# Altium PCB PCB1.PcbDoc
Units mil, origin at the board's own origin, x right, y up, seen from the top; angles counter-clockwise.
Board outline 3275 x 2910 mil, 2 copper layers (Top Layer, Bottom Layer); 11 components, 12 nets, 70 pads, 0 vias.
Unrouted connection lines stored in the file: 1.
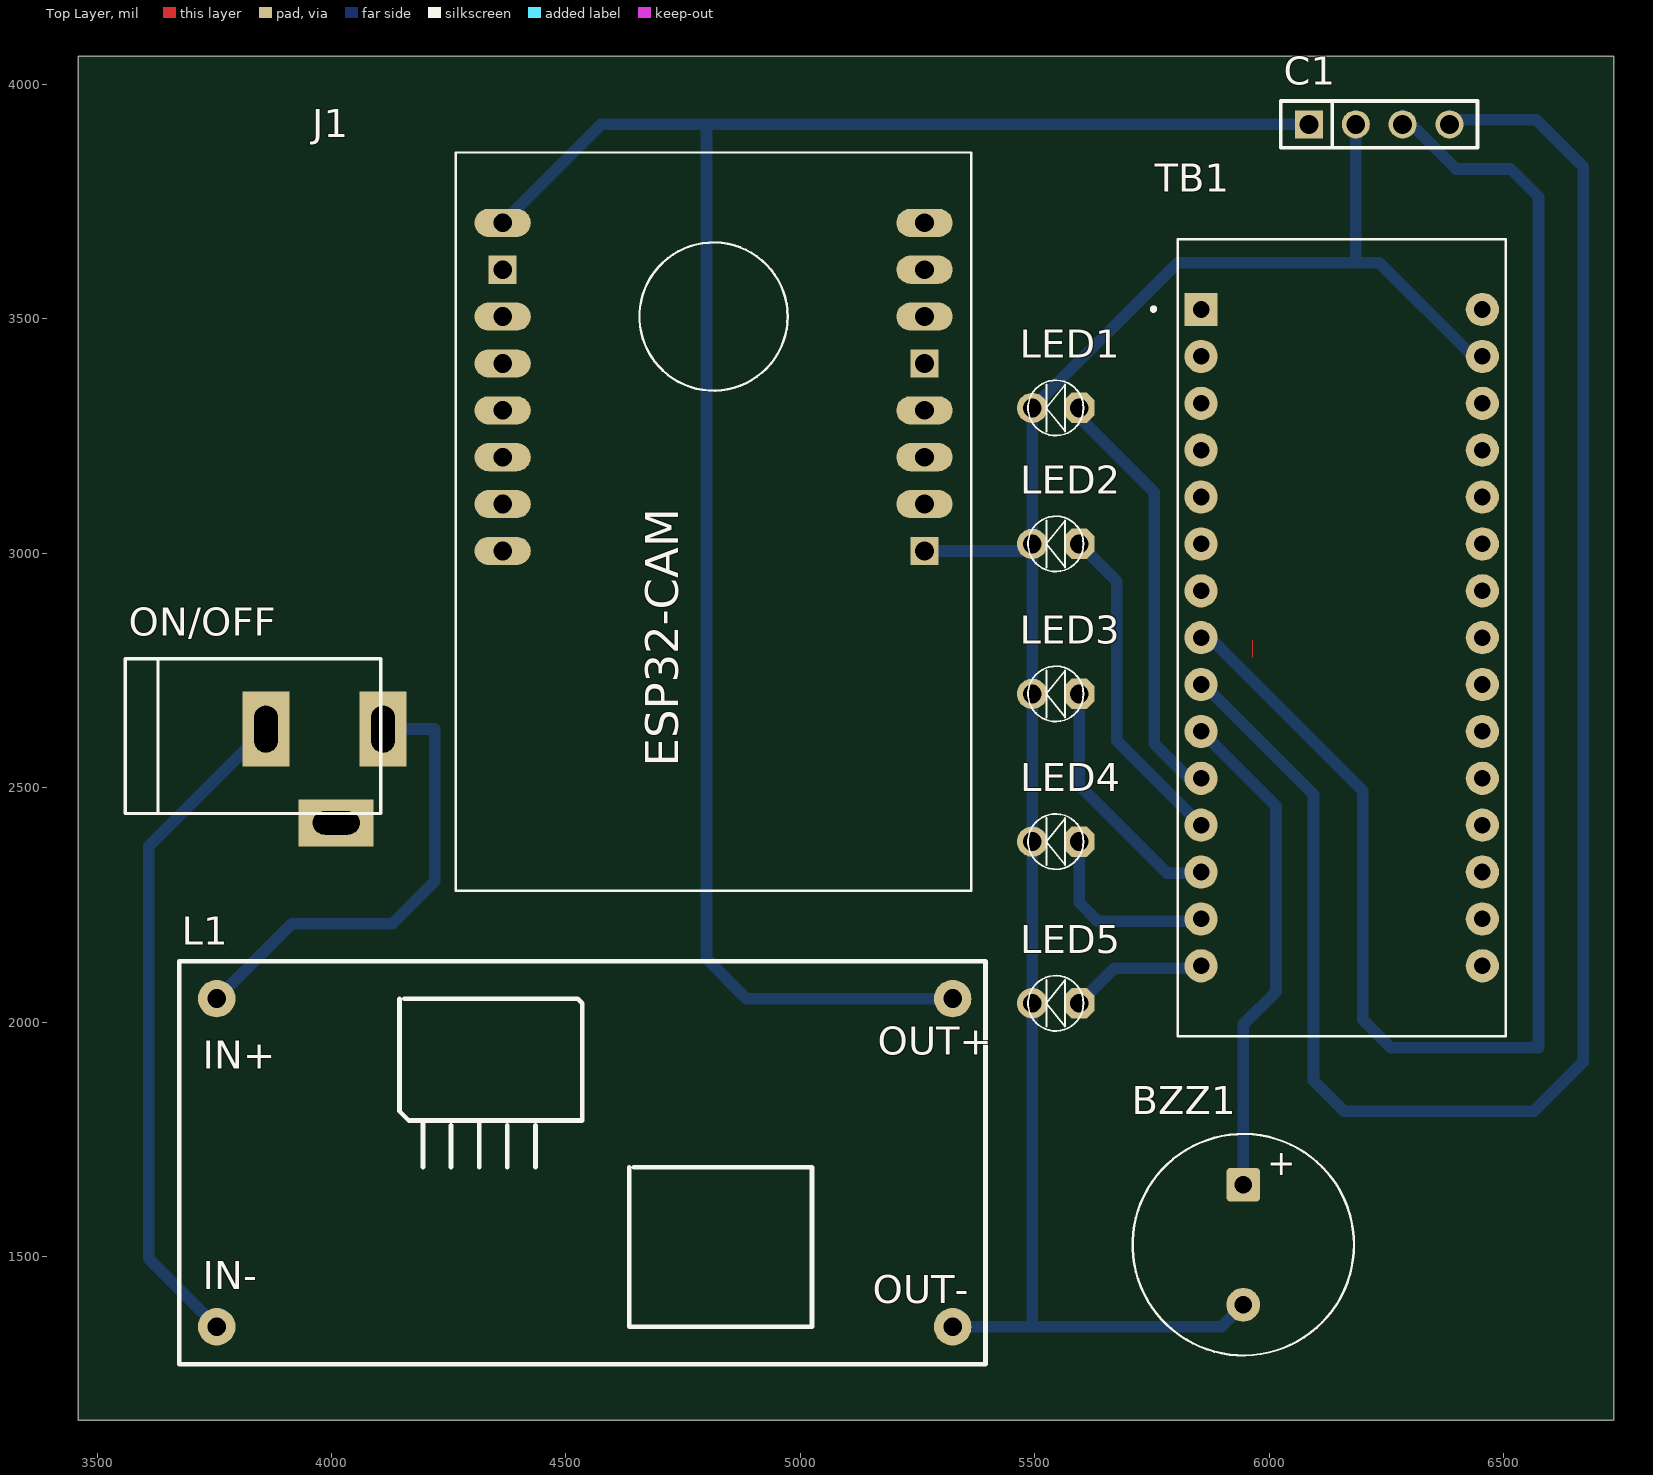
[diagram p0: Top Layer view]
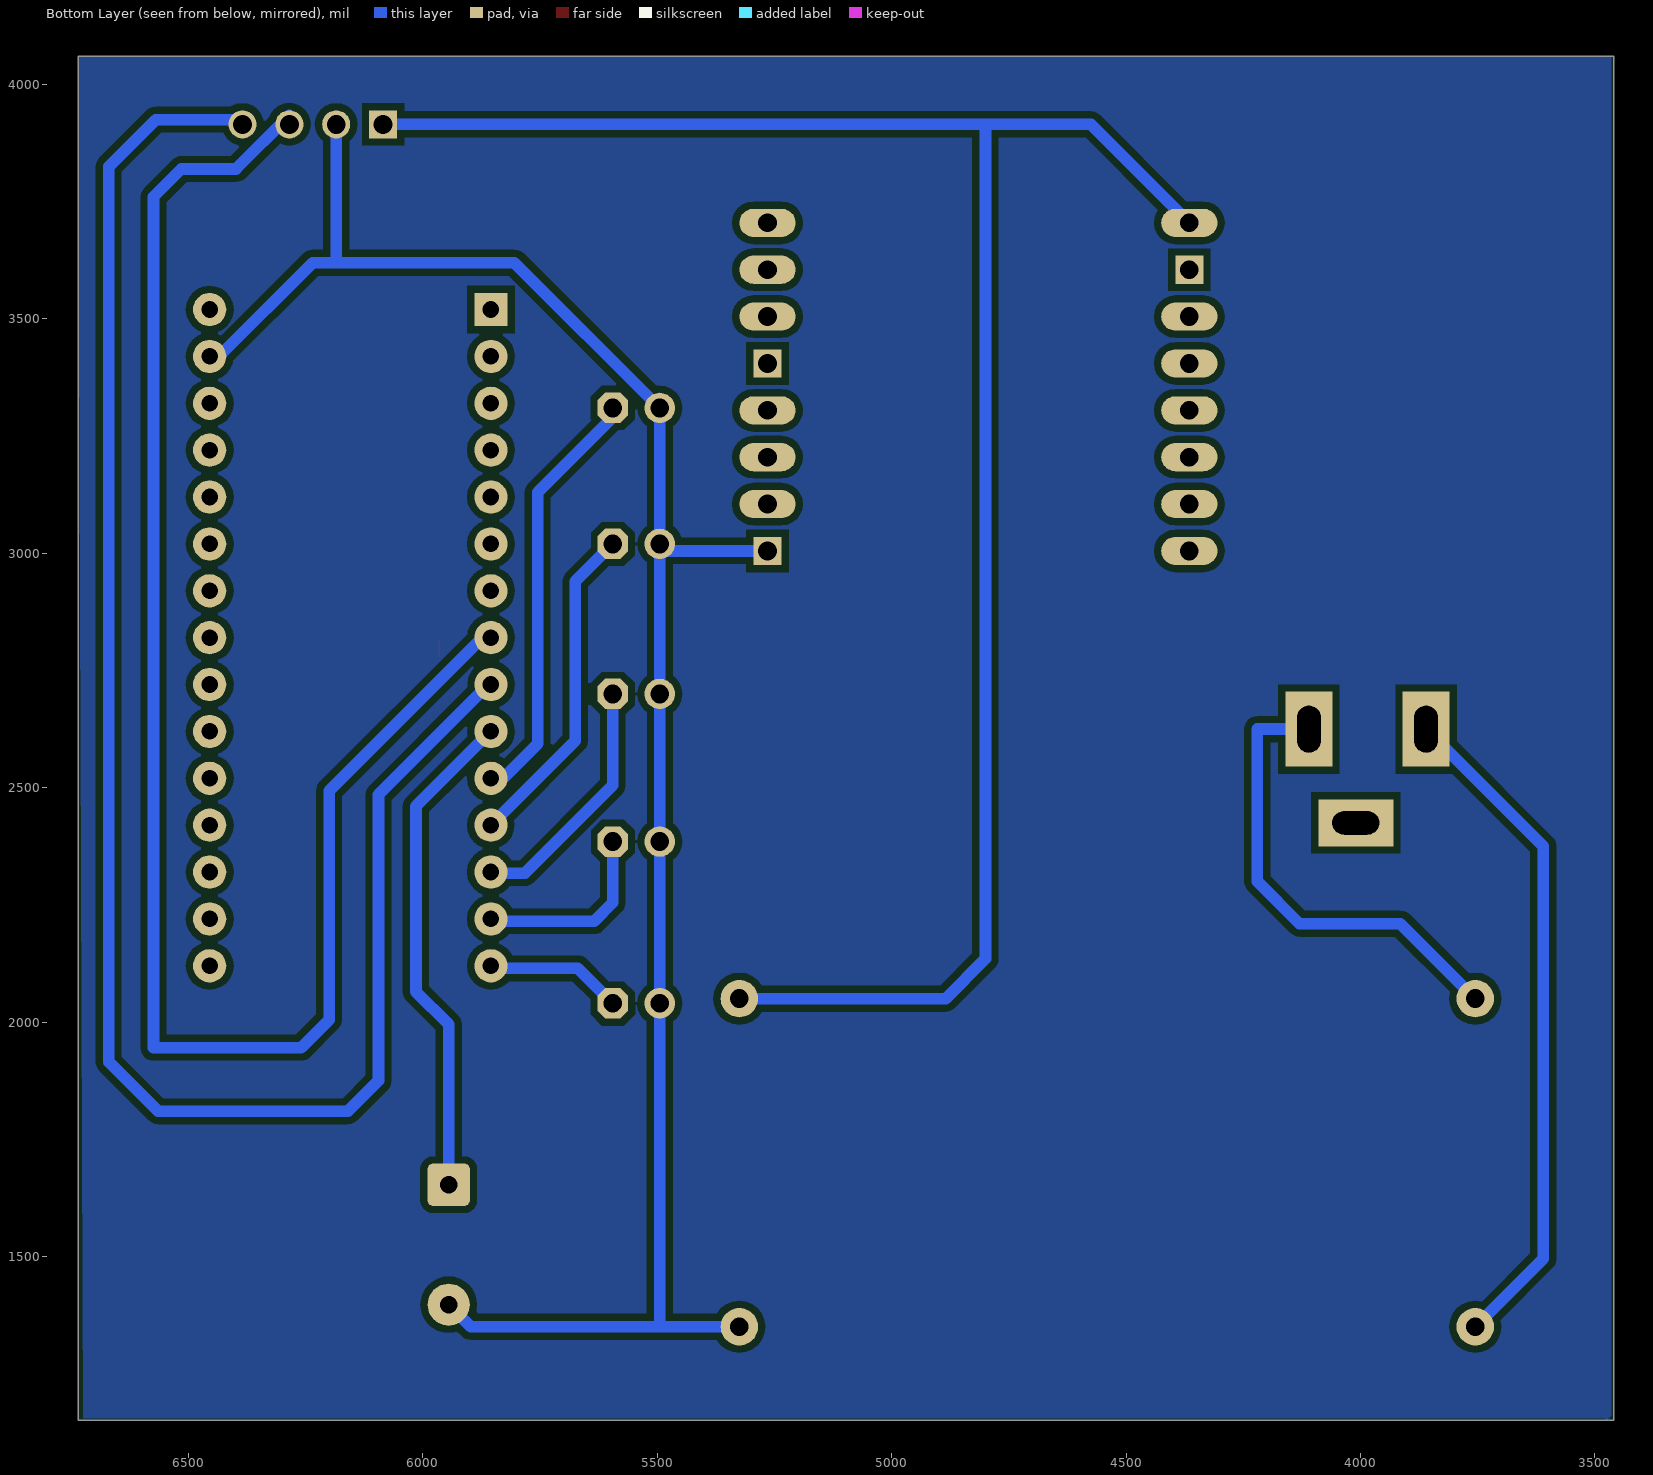
[diagram p1: Bottom Layer view, seen from below]
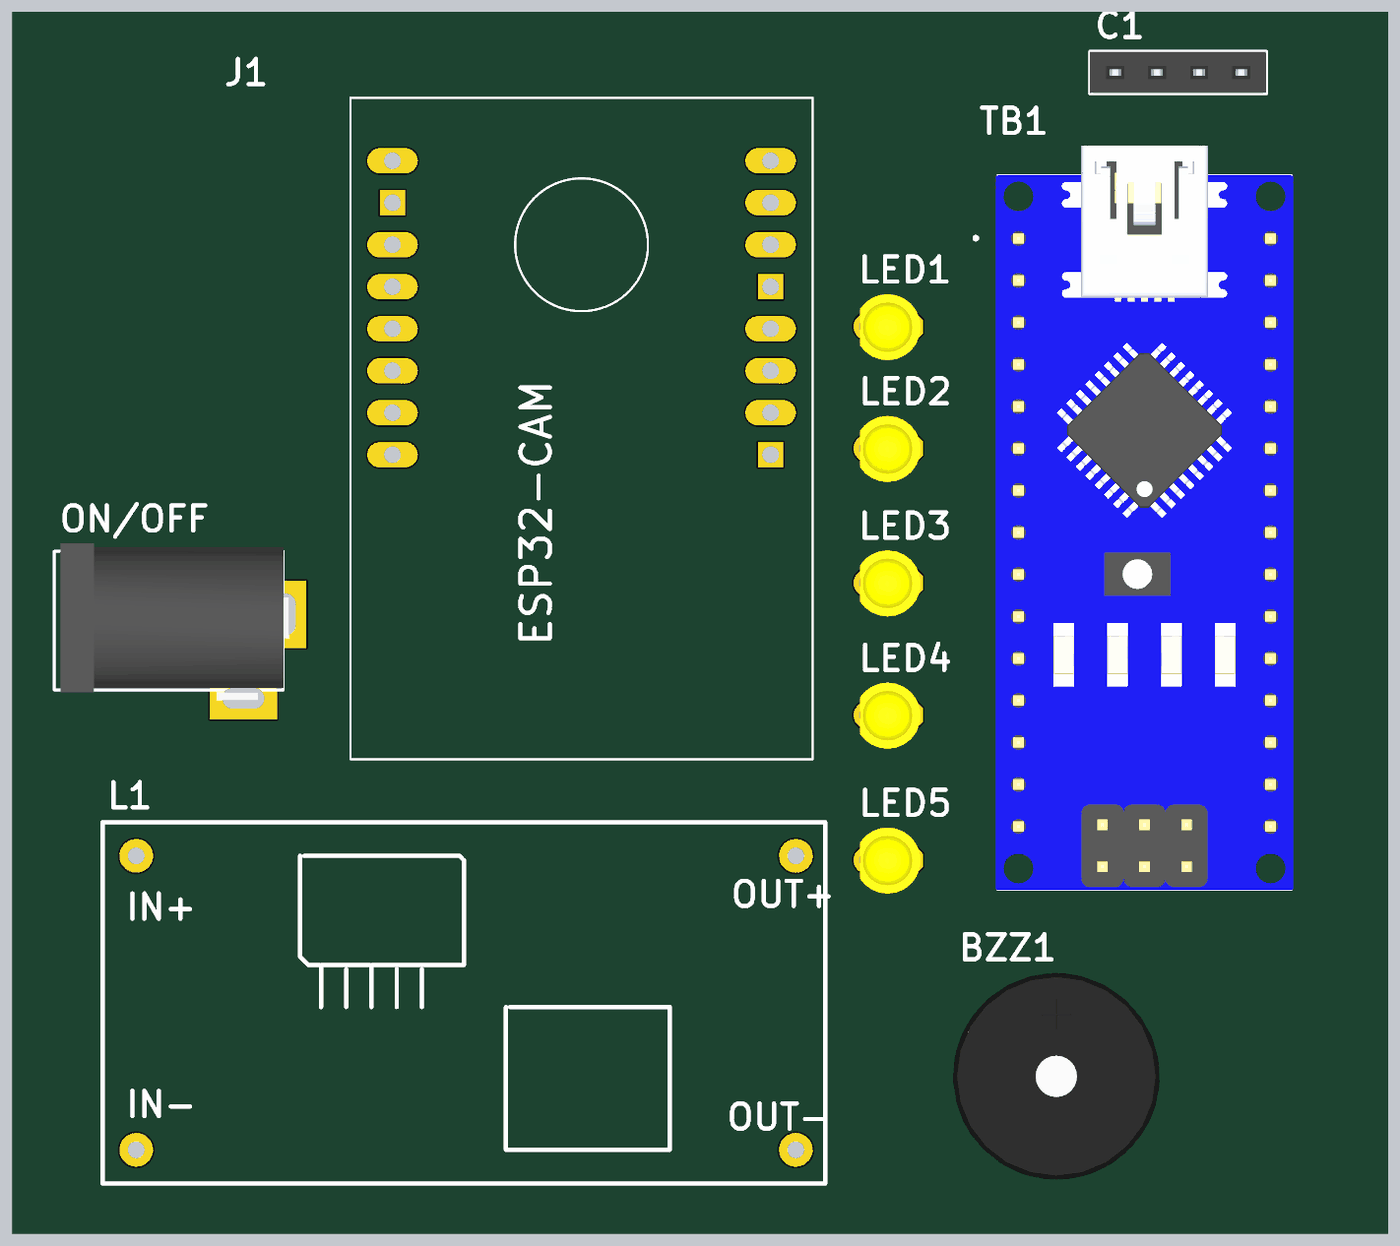
[diagram p2: 3D render of the assembled board from above, using the file's embedded part models]

## Layer stack, top to bottom
Top Solder: solder mask 0.4, Solder Resist, Dk 3.5
Top Layer: signal copper 1.4
Dielectric 1: dielectric 12.6, FR-4, Dk 4.8
Bottom Layer: signal copper 1.4
Bottom Solder: solder mask 0.4, Solder Resist, Dk 3.5

## Board outline
3460,1150 6735,1150 6735,4060 3460,4060

## Design rules (kind name [scope] priority, off if disabled: settings)
Clearance [All] p1: gap=15
PolygonConnect [All] p1: connectstyle=Relief reliefconductorwidth=10 reliefentries=4 polygonreliefangle="90 Angle" airgapwidth=10
RoutingVias [All] p1: holewidth=28 width=50 viastyle="Through Hole" minholewidth=28 minwidth=50 maxholewidth=28 maxwidth=50
SolderMaskExpansion [All] p1: expansion=4
Width [All] p1: maxlimit=50 minlimit=15 preferedwidth=25
30 further rules are at their usual default settings.

## Components (designator, comment, footprint, x,y, rotation, side; value= is the part's Value field where it differs from the comment)
BZZ1 "Buzzer" BUZZER_12.0X8.5MM 5945,1525 r270 top
C1 "JP4" JP4-C1T 6085,3915 r0 top
J1 "ESP32-CAM" ESP32-CAM 4815,3305 r180 top
L1 "BUCK_LM2596" BUCK_LM2596 4525,1730 r0 top
LED1 "LED" LED-3MM-YELLOW 5595,3310 r180 top
LED2 "LED" LED-3MM-YELLOW 5595,3020 r180 top
LED3 "LED" LED-3MM-YELLOW 5595,2700 r180 top
LED4 "LED" LED-3MM-YELLOW 5595,2385 r180 top
LED5 "LED" LED-3MM-YELLOW 5595,2040 r180 top
ON/OFF "POWER" DC-IN 3985,2525 r0 top
TB1 "ARDUINO_NANO" SHIELD_ARDUINO_NANO 6155,2820 r0 top

## Footprints (in the part's own frame and the unit in brackets; to place one, negate y for a bottom-side part, rotate by r counter-clockwise, add the part's x,y. Pads: shape width x height; smd on the part's side, far side on the other; paste and mask are expansions set on the pad)
BUCK_LM2596 [mil]
  round 80 hole 40: 1(-770,320) 2(-770,-380) 3(800,-380) 4(800,320)
  silkscreen extent -850,-460 870,400
BUZZER_12.0X8.5MM [mil]
  round 20 on Mech15: 0(0,0)
  rrect25% 72x72 / inner rrect25% 72x72 / far side rrect25% 90x90 hole 38: 1(-127.95,0)
  round 72 / inner round 72 / far side round 90 hole 38: 2(127.95,0)
  silkscreen extent -236,-236 236,236, body extent -246,-246 246,246, height 354
DC-IN [mil] "Jac DC input"
  rect 100x160 hole 50 slot 100 at 90 deg: 1(125,100) 2(-125,100)
  rect 160x100 hole 50 slot 100 at 0 deg: 3(25,-100)
  silkscreen extent -425,-80 120,250, body extent -410,-105 134,269, height 434
ESP32-CAM [mil]
  rect 60x60 / inner round 60 / far side rect 60x60 hole 40: P$1(-450,300) P$5(-450,-100) P$10(450,-300)
  oval 120x60 hole 40: P$2(-450,200) P$3(-450,100) P$4(-450,0) P$6(-450,-200) P$7(-450,-300) P$8(-450,-400) P$9(450,-400) P$11(450,-200) P$12(450,-100) P$13(450,0) P$14(450,100) P$15(450,200) P$16(450,300)
  silkscreen extent -550,-550 550,1025
JP4-C1T [mm] "4 row, straight, gold plating"
  rect 1.52x1.52 hole 1.02: 1(0,0)
  round 1.52 hole 1.02: 2(2.54,0) 3(5.08,0) 4(7.62,0)
  silkscreen extent -1.52,-1.27 9.14,1.27, body extent -1.52,-1.25 9.14,1.25, height 8.51
LED-3MM-YELLOW [mil]
  oct 65x65 hole 40: 1(0,0)
  round 65 hole 40: 2(100,0)
  silkscreen extent -9,-59 109,59, body extent -27,-77 117,80, height 181
SHIELD_ARDUINO_NANO [mm]
  rect 1.8x1.8 / inner round 1.8 / far side rect 1.8x1.8 hole 0.9: 1(-7.62,17.78)
  round 1.8 hole 0.9: 2(-7.62,15.24) 3(-7.62,12.7) 4(-7.62,10.16) 5(-7.62,7.62) 6(-7.62,5.08) 7(-7.62,2.54) 8(-7.62,0) 9(-7.62,-2.54) 10(-7.62,-5.08) 11(-7.62,-7.62) 12(-7.62,-10.16) 13(-7.62,-12.7) 14(-7.62,-15.24) 15(-7.62,-17.78) 16(7.62,-17.78) 17(7.62,-15.24) 18(7.62,-12.7) 19(7.62,-10.16) 20(7.62,-7.62) 21(7.62,-5.08) 22(7.62,-2.54) 23(7.62,0) 24(7.62,2.54) 25(7.62,5.08) 26(7.62,7.62) 27(7.62,10.16) 28(7.62,12.7) 29(7.62,15.24) 30(7.62,17.78)
  silkscreen extent -10.3,-21.59 8.89,21.59, body extent -9,-21.6 9,23.4, height 12.6

## Part data
C1: "WR-PHD 2.54 mm Angled Socket Header"
J1: "ESP32 ESP32 Transceiver; 802.11 a/b/g/n (Wi-Fi, WiFi, WLAN), Bluetooth® Smart 4.x Low Energy (BLE) Evaluation Board"
LED1 LED2 LED3 LED4 LED5: "LED Single colour Green and Red"
ON/OFF: library part DCIN
TB1: "Small, complete, and breadboard-friendly board based on the ATmega328 (Arduino Nano 3.x)"

## Nets (pads, with @x,y where several pads share a name; then routed paths per layer and width w, separated by ;. In a path a pad name is that pad's centre, name@x,y a point inside that pad or via, vN(x,y) a via of type N, cw(c..) or ccw(c..) an arc to the next point about the centre after c; other vN are vias at no path point)
D5: C1.3 TB1.8 | length 3595.9
  Top Layer w0: 5965,2777.93 5965,2815
  Bottom Layer w25: TB1.8@5864.07,2829.07 6200,2493.14 6200,2005 6260,1945 6575,1945 6575,3760 6515,3820 6398.79,3820 6285,3933.79 C1.3
D6: C1.4 TB1.9 | length 3836.2
  Bottom Layer w25: TB1.9@5850,2715 5865,2715 6095,2485 6095,1875 6160,1810 6565,1810 6670,1915 6670,3825 6570,3925 6395,3925 C1.4
D7: BZZ1.1 TB1.10 | length 1062.3
  Bottom Layer w25: TB1.10 6015,2460 6015,2065 5945,1995 BZZ1.1
D8: LED1.1 TB1.11 | length 912.8
  Bottom Layer w25: LED1.1 5595,3290 5755,3130 5755,2594.13 5829.13,2520 TB1.11
D9: LED2.1 TB1.12 | length 707.7
  Bottom Layer w25: LED2.1 5675,2940 5675,2600 TB1.12
D10: LED3.1 TB1.13 | length 530.2
  Bottom Layer w25: LED3.1 5595,2505 5782.5,2317.5 TB1.13@5852.5,2317.5
D11: LED4.1 TB1.14 | length 406.6
  Bottom Layer w25: LED4.1 5595,2255 5635,2215 TB1.14@5855,2215
D12: LED5.1 TB1.15 | length 291.1
  Bottom Layer w25: LED5.1 5670,2115 TB1.15@5855,2115
GND: BZZ1.2 C1.2 J1.P$1 L1.3 LED1.2 LED2.2 LED3.2 LED4.2 LED5.2 TB1.29 | length 4467.4
  Bottom Layer w25: J1.P$1 5480,3005 LED2.2 ; BZZ1.2 5897.95,1350 L1.3 5495,1350 LED5.2 LED4.2 LED3.2 LED2.2 ; 6184,3625 6185,3626 C1.2 ; TB1.29 6435,3420 6235,3620 5805,3620 LED1.2 LED2.2
NetL1_1: L1.1 ON/OFF.1 | length 1003.6
  Bottom Layer w25: L1.1 3915,2210 4130,2210 4220,2300 4220,2625 ON/OFF.1
NetL1_2: L1.2 ON/OFF.2 | length 1438.6
  Bottom Layer w25: L1.2 3610,1495 3610,2375 ON/OFF.2
VCC: C1.1 J1.P$9 L1.4 | length 5432.2
  Bottom Layer w25: J1.P$9 4575,3915 C1.1 4800,3915 4800,2135 4885,2050 L1.4
pads on no net: BZZ1.0 J1.P$2 J1.P$3 J1.P$4 J1.P$5 J1.P$6 J1.P$7 J1.P$8 J1.P$10 J1.P$11 J1.P$12 J1.P$13 J1.P$14 J1.P$15 J1.P$16 ON/OFF.3 TB1.1 TB1.2 TB1.3 TB1.4 TB1.5 TB1.6 TB1.7 TB1.16 TB1.17 TB1.18 TB1.19 TB1.20 TB1.21 TB1.22 TB1.23 TB1.24 TB1.25 TB1.26 TB1.27 TB1.28 TB1.30

## Polygon pours and split planes (outlines as drawn)
no net on Bottom Layer "Top Layer-No Net" (solid, pour order 2): 6735,4060 3465,4060 3465,1160 3475,1150 3480,1155 6725,1155

## Text inside footprints (layer, text, board x,y; h text height)
BZZ1: Top Overlay "+" at 5996.18,1654.92 h90
L1: Top Overlay "OUT-" at 5155,1400 h60; Top Overlay "OUT+" at 5165,1930 h60; Top Overlay "IN-" at 3725,1430 h60; Top Overlay "IN+" at 3725,1900 h60